# Altium PCB PlacaEj6.PcbDoc
Units mm, origin at the board's own origin, x right, y up, seen from the top; angles counter-clockwise.
Board outline 152.4 x 101.6 mm, 2 copper layers (Top Layer, Bottom Layer); 13 components, 17 nets, 72 pads, 4 vias.
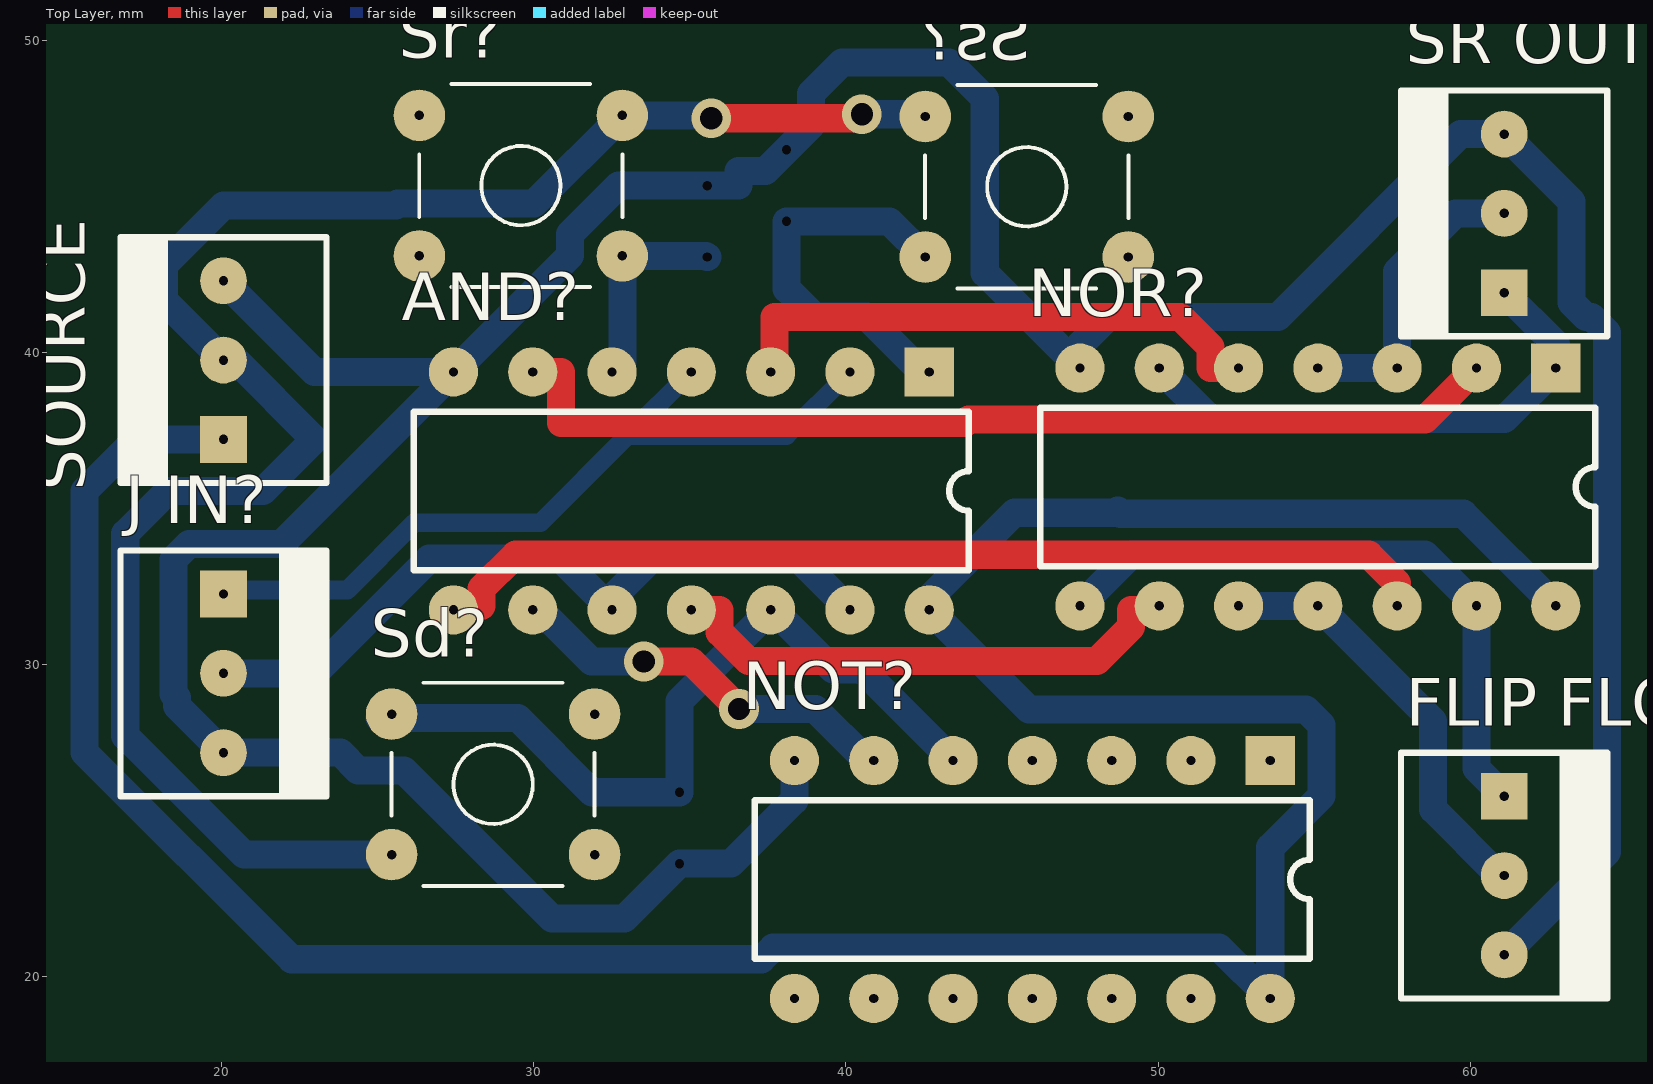
[diagram p0: Top Layer view]
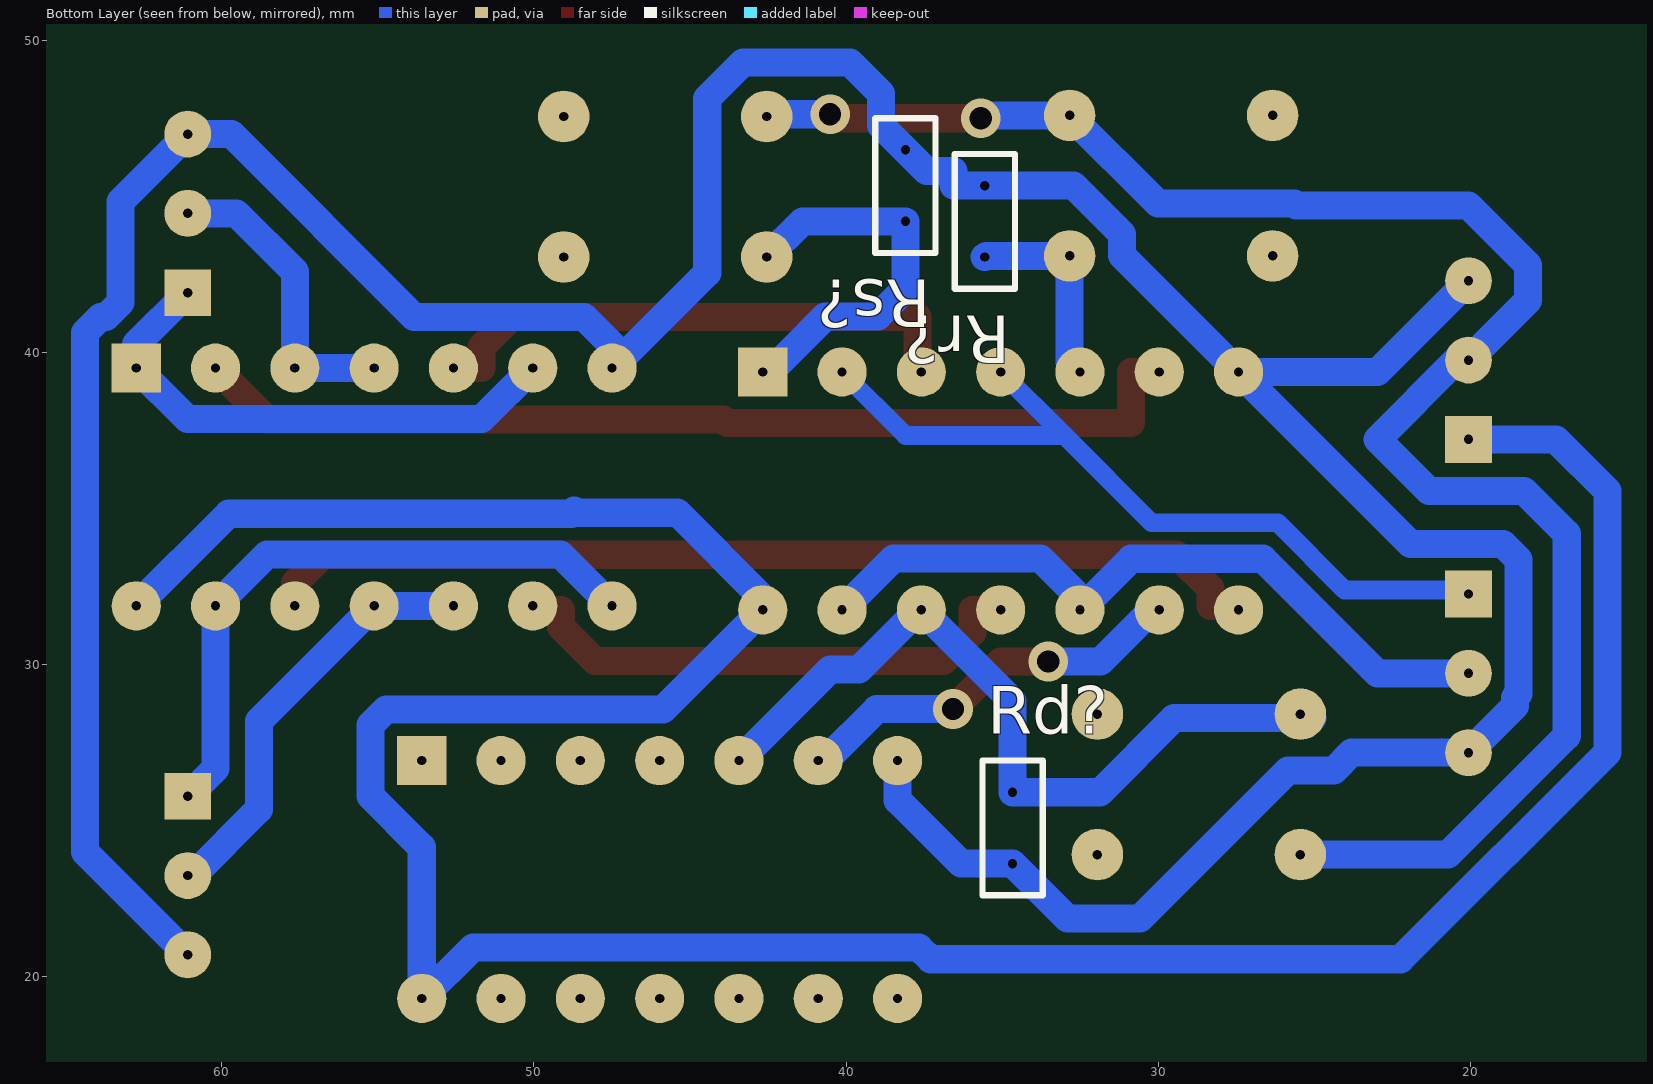
[diagram p1: Bottom Layer view, seen from below]
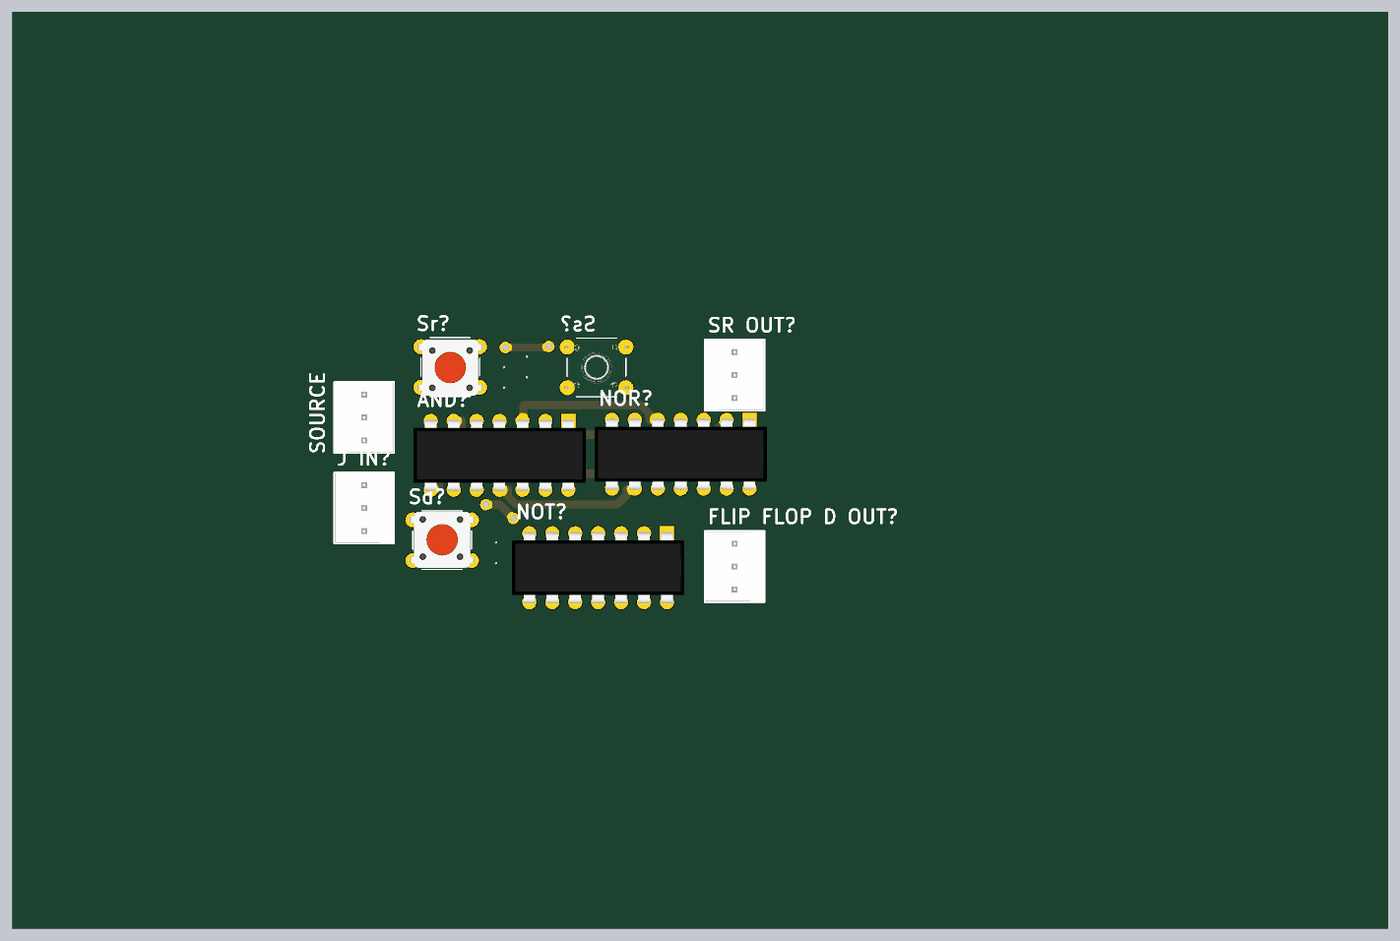
[diagram p2: 3D render of the assembled board from above, using the file's embedded part models]
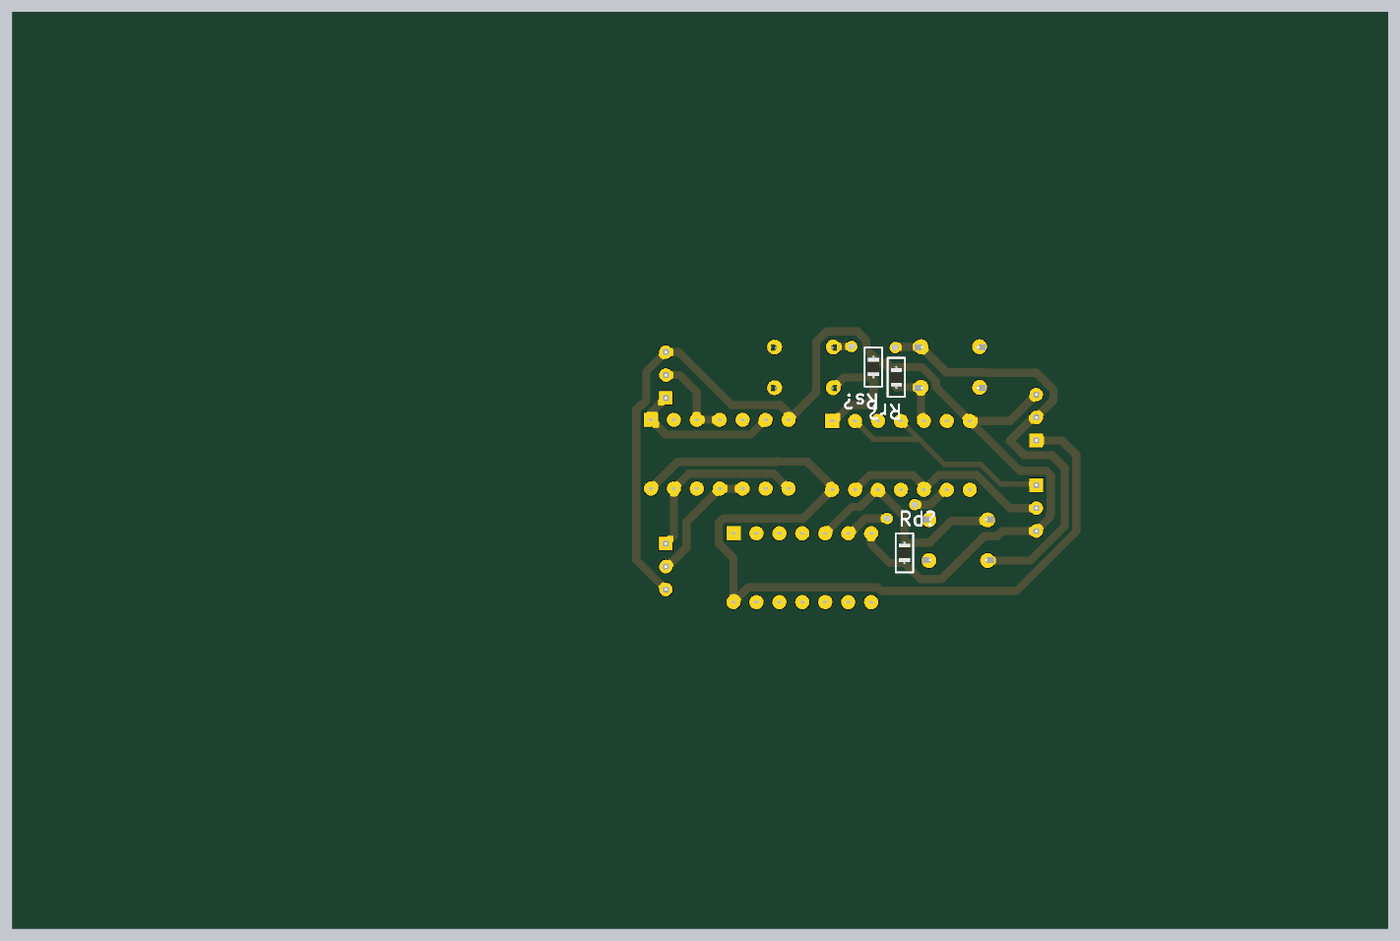
[diagram p3: 3D render of the assembled board from below, using the file's embedded part models]

## Layer stack, top to bottom
Top Solder: solder mask 0.0102, Solder Resist, Dk 3.5
Top Layer: signal copper 0.0356
Dielectric 1: dielectric 0.32, FR-4, Dk 4.8
Bottom Layer: signal copper 0.0356
Bottom Solder: solder mask 0.0102, Solder Resist, Dk 3.5

## Board outline
-18.923,-16.891 133.477,-16.891 133.477,84.709 -18.923,84.709

## Design rules (kind name [scope] priority, off if disabled: settings)
Clearance [All] p1: gap=0.4 ignorepadtopadclearanceinfootprint=FALSE
PolygonConnect [All] p1: connectstyle=Relief reliefconductorwidth=0.254 reliefentries=4 polygonreliefangle="90 Angle" airgapwidth=0.254
RoutingVias [All] p1: holewidth=0.5 width=2 viastyle="Through Hole" minholewidth=0.3 minwidth=1.5 maxholewidth=0.5 maxwidth=2
SolderMaskExpansion [All] p1: expansion=0.102
Width [All] p1: maxlimit=0.9 minlimit=0.6 preferedwidth=0.9 minimp=50.000000 maximp=50.000000 favimp=50.000000
30 further rules are at their usual default settings.

## Components (designator, comment, footprint, x,y, rotation, side; value= is the part's Value field where it differs from the comment)
AND? "HC08" DIP14 42.672,39.37 r270 top
"FLIP FLOP D OUT?" "MOLEX3" MOLEX3 61.087,25.781 r270 top
"J IN?" "MOLEX3" MOLEX3 20.066,32.258 r270 top
NOR? "HC02" DIP14 62.738,39.497 r270 top
NOT? "HC04" DIP14 53.594,26.924 r270 top
Rd? "RES" 0805 34.671,24.765 r90 bottom
Rr? "RES" 0805 35.56,44.196 r270 bottom
Rs? "RES" 0805 38.1,45.339 r270 bottom
Sd? "TACT SWITCH" TACTSWITCH#1 28.702,26.162 r90 top
SOURCE "MOLEX3" MOLEX3 20.066,37.211 r90 top
"SR OUT?" "MOLEX3" MOLEX3 61.087,41.91 r90 top
Sr? "TACT SWITCH" TACTSWITCH#1 29.591,45.339 r270 top
Ss? "TACT SWITCH" TACTSWITCH#2 45.795,45.303 r270 top

## Footprints (in the part's own frame and the unit in brackets; to place one, negate y for a bottom-side part, rotate by r counter-clockwise, add the part's x,y. Pads: shape width x height; smd on the part's side, far side on the other; paste and mask are expansions set on the pad)
0805 [mm] "Pasivo 0805"
  round 0 hole 0.3 unplated: 1(-1.143,0) 2(1.143,0)
  silkscreen extent -2.16,-0.97 2.16,0.97, body extent -1,-0.62 1,0.63, height 0.39
DIP14 [mil]
  rect 62x62 hole 11.81: 1(0,0)
  round 62 hole 11.81: 2(0,-100) 3(0,-200) 4(0,-300) 5(0,-400) 6(0,-500) 7(0,-600) 8(300,-600) 9(300,-500) 10(300,-400) 11(300,-300) 12(300,-200) 13(300,-100) 14(300,0)
  silkscreen extent 50,-650 250,50, body extent -5,-675 305,75, height 165
MOLEX3 [mm]
  rect 1.5x1.5 hole 0.3: 1(0,0)
  round 1.5 hole 0.3: 2(2.54,0) 3(5.08,0)
  silkscreen extent -1.4,-3.3 6.48,3.3, body extent -1.27,-3.18 6.35,3.18, height 10.74
TACTSWITCH#1 [mm]
  round 1.651 hole 0.3: 1(-2.25,-3.25) 2(-2.25,3.25) 3(2.25,-3.25) 4(2.25,3.25)
  silkscreen extent -3.25,-3.25 3.25,3.25, body extent -3.05,-3.95 3.15,3.95, height 7
TACTSWITCH#2 [mm]
  round 1.651 hole 0.3: 1(-2.25,3.25) 2(-2.25,-3.25) 3(2.25,3.25) 4(2.25,-3.25)
  silkscreen extent -3.25,-3.25 3.25,3.25, body extent -3.05,-3.95 3.15,3.95, height 7

## Part data
AND? NOR? NOT?: library part IC_DIP14

## Via types
v1: diameter 1.27, hole 0.711, Top Layer to Bottom Layer, 4 vias

## Nets (pads, with @x,y where several pads share a name; then routed paths per layer and width w, separated by ;. In a path a pad name is that pad's centre, name@x,y a point inside that pad or via, vN(x,y) a via of type N, cw(c..) or ccw(c..) an arc to the next point about the centre after c; other vN are vias at no path point)
+VCC: AND?.14 NOR?.14 NOT?.14 SOURCE.1 | length 101.5
  Bottom Layer w0.9: SOURCE.1 17.272,37.211 15.621,35.56 15.621,27.178 22.239,20.56 37.295,20.56 37.676,20.941 51.957,20.941 NOT?.14 53.594,24.147 55.231,25.785 55.231,28.063 54.733,28.561 45.861,28.561 AND?.14 42.672,32.131 45.402,34.861 48.644,34.861 48.708,34.925 48.805,34.828 59.787,34.828 NOR?.14
CLK: "J IN?.2" AND?.10 AND?.13 | length 23.9
  Bottom Layer w0.9: 20.066,29.718 22.987,29.718 26.656,33.387 30.875,33.387 AND?.10 32.512,32.131 33.782,33.401 38.481,33.401 AND?.13
D: AND?.12 NOT?.5 Rd?.2 Sd?.4 | length 25.5
  Bottom Layer w0.9: Sd?.4@25.071,28.285 29.5,28.285 31.877,25.908 Rd?.2 34.671,28.829 AND?.12 37.682,31.75 39.587,29.845 40.513,29.845 NOT?.5
D&Clk: AND?.11 NOR?.9 | length 17.1
  Top Layer w0.9: AND?.11 35.955,31.75 35.955,31.035 36.877,30.113 48.049,30.113 49.135,31.199 49.135,31.75 49.911,31.75 NOR?.9
E: "J IN?.1" AND?.2 AND?.4 | length 26
  Bottom Layer w0.6: 19.939,32.385 24.028,32.385 26.18,34.537 30.219,34.537 33.02,37.338 ; AND?.4 33.02,37.338 ; AND?.2 38.1,37.338 33.02,37.338
GND: "FLIP FLOP D OUT?.3" "J IN?.3" "SR OUT?.3" AND?.7 NOR?.7 NOT?.7 Rd?.1 Rr?.1 Rs?.1 SOURCE.3 | length 129.2
  Bottom Layer w0.9: SOURCE.3 22.987,39.37 AND?.7 ; NOT?.7 38.354,25.654 36.322,23.622 Rd?.1 32.909,21.86 30.591,21.86 25.842,26.609 24.377,26.609 23.808,27.178 20.066,27.178 18.572,28.672 18.572,28.949 18.466,29.055 18.466,33.36 18.964,33.858 21.92,33.858 AND?.7 ; 61.087,20.701 64.375,23.989 64.375,40.636 63.877,41.134 63.701,41.134 63.246,41.589 63.246,44.831 61.087,46.99 59.69,46.99 53.834,41.134 48.401,41.134 47.498,40.232 NOR?.7 44.45,42.545 44.45,48.133 43.307,49.276 39.882,49.276 38.889,48.283 38.889,47.271 Rs?.1 37.426,45.808 36.568,45.808 36.568,45.339 Rr?.1 32.721,45.339 31.166,43.783 31.166,43.104 AND?.7
nD: AND?.9 NOT?.6 | length 12.9
  Top Layer w0.9: v1(33.528,30.099) 35.052,30.099 v1(36.576,28.575)
  Bottom Layer w0.9: AND?.9 30.196,31.75 31.847,30.099 v1(33.528,30.099) ; v1(36.576,28.575) 39.019,28.575 40.67,26.924 NOT?.6
nD&Clk: AND?.8 NOR?.12 | length 32.4
  Top Layer w0.9: AND?.8 27.559,31.877 28.335,31.877 28.335,32.428 29.421,33.514 56.755,33.514 57.658,32.612 NOR?.12
nQd: "FLIP FLOP D OUT?.2" NOR?.10 NOR?.11 | length 13.7
  Bottom Layer w0.9: NOR?.10 NOR?.11 58.801,28.194 58.801,25.365 60.925,23.241 61.087,23.241
nQrs: "SR OUT?.2" NOR?.3 NOR?.4 | length 9.8
  Bottom Layer w0.9: NOR?.4 NOR?.3 57.658,42.58 59.528,44.45 61.087,44.45
Qd: "FLIP FLOP D OUT?.1" NOR?.8 NOR?.13 | length 20.5
  Bottom Layer w0.9: NOR?.8 49.149,33.528 58.547,33.528 NOR?.13 60.198,26.67 61.087,25.781
Qrs: "SR OUT?.1" NOR?.1 NOR?.6 | length 17.2
  Bottom Layer w0.9: NOR?.6 51.675,37.86 61.101,37.86 NOR?.1 62.738,40.259 61.087,41.91
R: AND?.5 Rr?.2 Sr?.4 | length 6.6
  Bottom Layer w0.9: AND?.5 32.841,39.699 Sr?.4 35.524,43.089 Rr?.2
R&E: AND?.6 NOR?.2 | length 32.6
  Top Layer w0.9: AND?.6 30.875,39.37 30.875,37.733 43.811,37.733 43.925,37.846 58.547,37.846 NOR?.2
S: AND?.1 Rs?.2 Ss?.4 | length 12.8
  Bottom Layer w0.9: Ss?.4 41.402,44.196 Rs?.2 38.1,42.037 38.989,41.148 40.67,41.148 41.769,40.048 41.769,40.046 42.446,39.37 AND?.1
S&E: AND?.3 NOR?.5 | length 17.8
  Top Layer w0.9: AND?.3 37.719,39.497 37.719,41.134 50.716,41.134 51.675,40.175 51.675,39.497 NOR?.5
SWIN: Sd?.2 SOURCE.2 Sr?.2 Ss?.2 | length 58.2
  Top Layer w0.9: v1(35.687,47.498) 40.386,47.498 v1(40.513,47.625)
  Bottom Layer w0.9: Sd?.2 20.725,23.912 16.921,27.716 16.921,34.193 18.288,35.56 21.336,35.56 22.987,37.211 20.447,39.751 SOURCE.2 18.161,41.656 18.161,42.799 20.066,44.704 25.586,44.704 25.647,44.765 30.017,44.765 Sr?.2 35.596,47.589 v1(35.687,47.498) ; v1(40.513,47.625) 42.473,47.625 Ss?.2
pads on no net: NOT?.1 NOT?.2 NOT?.3 NOT?.4 NOT?.8 NOT?.9 NOT?.10 NOT?.11 NOT?.12 NOT?.13 Sd?.1 Sd?.3 Sr?.1 Sr?.3 Ss?.1 Ss?.3